# Altium PCB XILINX_LA11.PcbDoc (part 1 of 2)
Units mil, origin at the board's own origin, x right, y up, seen from the top; angles counter-clockwise.
Board outline 4330.71 x 2834.65 mil, 2 copper layers (Top Layer, Bottom Layer); 123 components, 151 nets, 621 pads, 218 vias.
Unrouted connection lines stored in the file: 1.
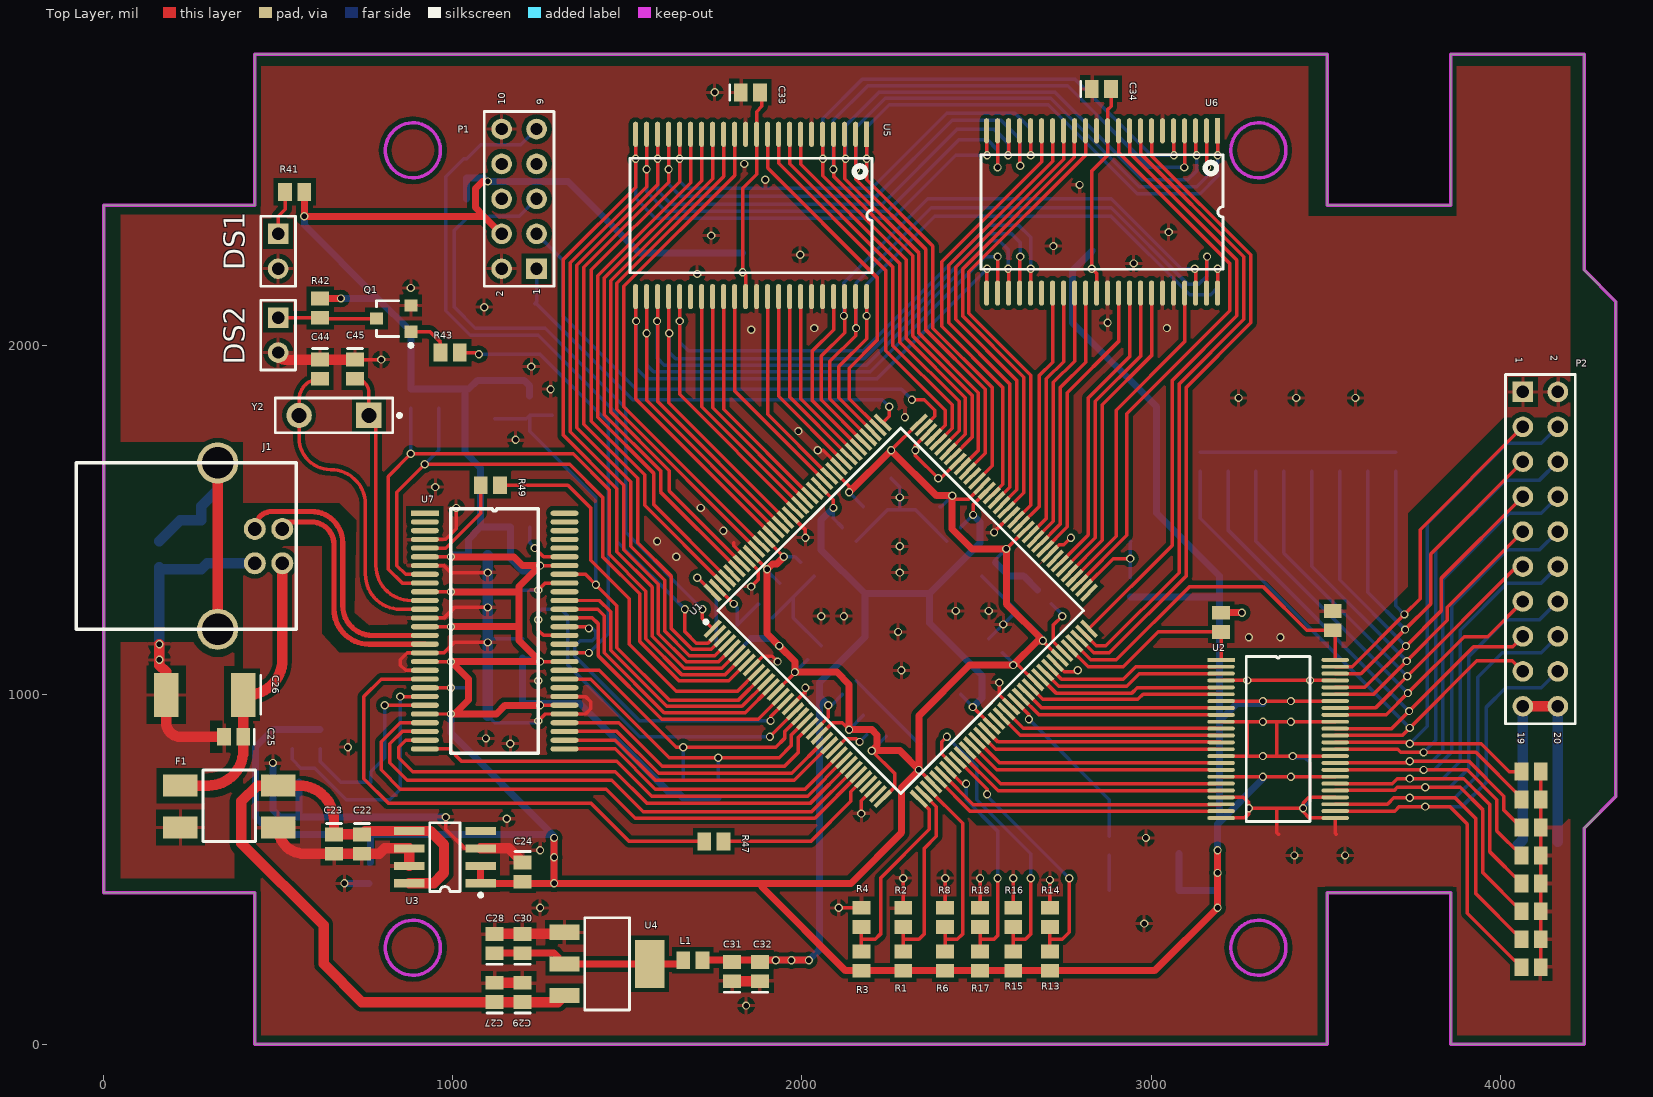
[diagram p0: Top Layer view]
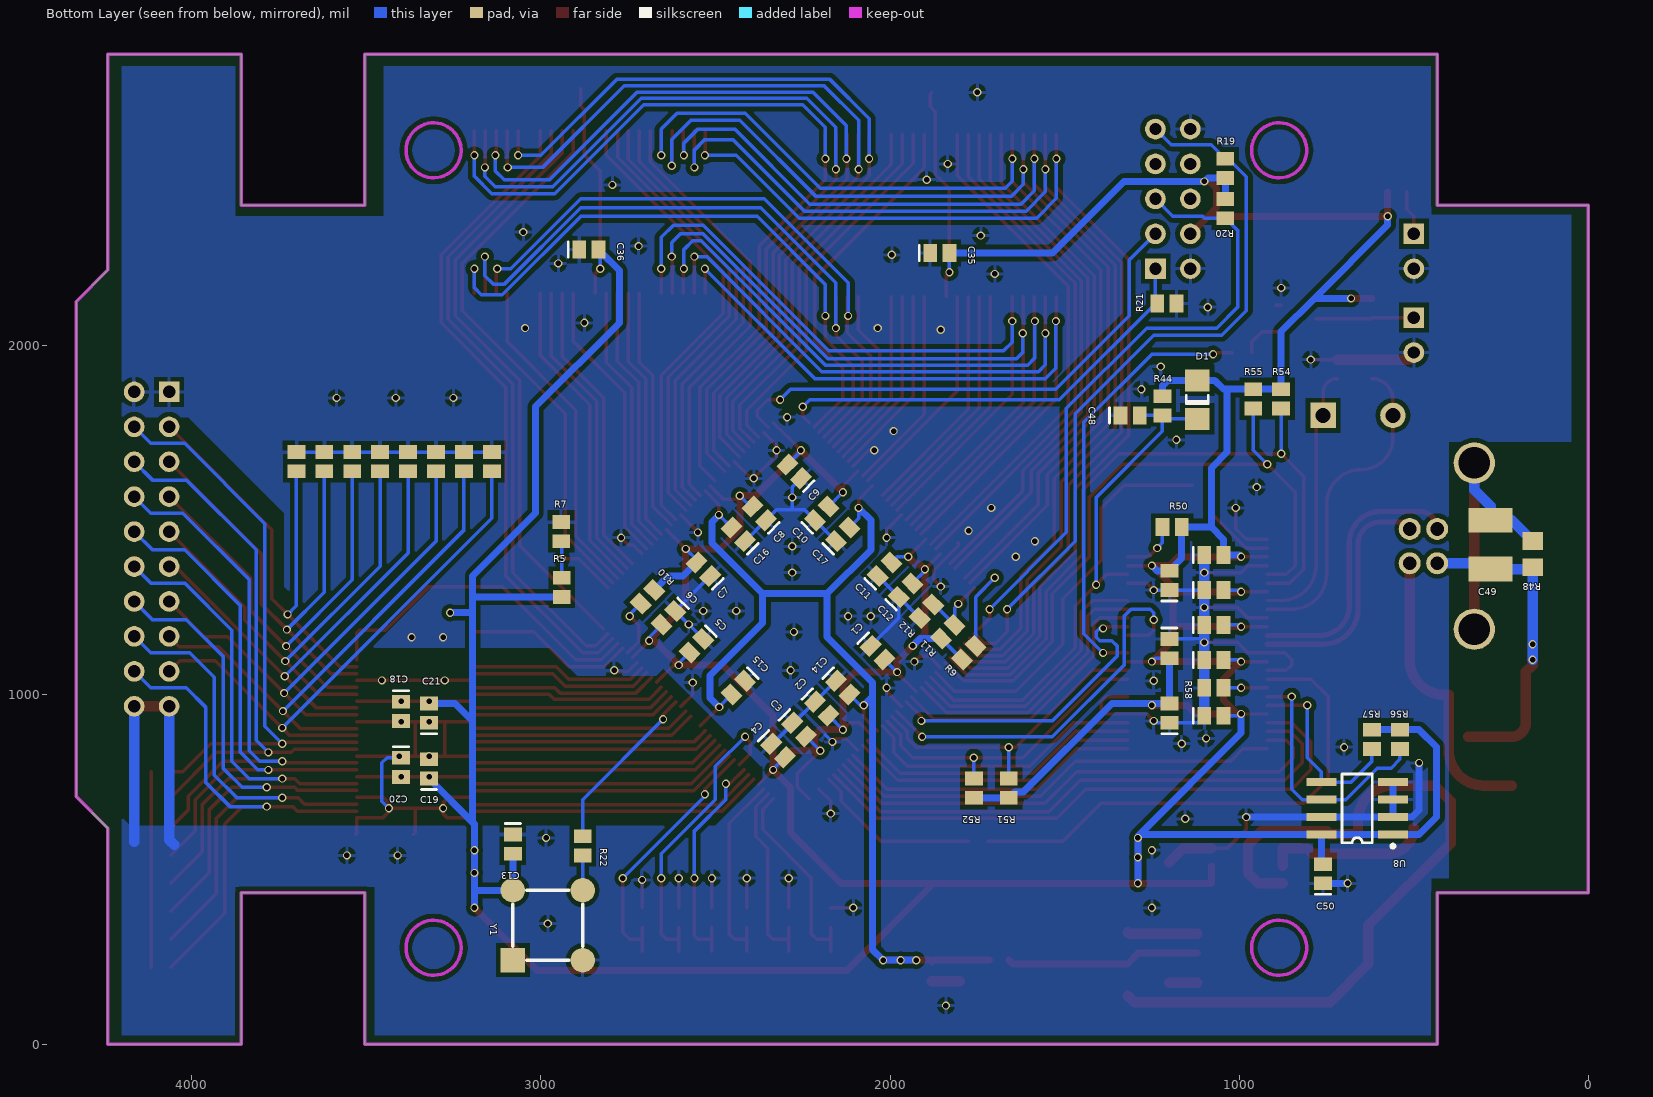
[diagram p1: Bottom Layer view, seen from below]

## Layer stack, top to bottom
Top Layer: signal copper 1.4
Dielectric: dielectric 12.6, FR-4, Dk 4.8
Bottom Layer: signal copper 1.4

## Board outline
0,433.07 0,2401.57 433.07,2401.57 433.07,2834.65 3503.94,2834.65 3503.94,2401.57 3858.27,2401.57 3858.27,2834.65 4240,2834.65 4240,2216.69 4330.71,2125.98 4330.71,708.66 4240,617.95 4240,0 3858.27,0 3858.27,433.07 3503.94,433.07 3503.94,0 433.07,0 433.07,433.07 0,433.07

## Design rules (kind name [scope] priority, off if disabled: settings)
Clearance [All] p1: gap=8
PolygonConnect [All] p1: connectstyle=Relief reliefconductorwidth=10 reliefentries=4 polygonreliefangle="90 Angle"
RoutingVias [All] p1: holewidth=15.75 width=23.62 viastyle="Through Hole" minholewidth=15.75 minwidth=23.62 maxholewidth=15.75 maxwidth=23.62
SilkscreenOverComponentPads [All] p1: minsilkscreentomaskgap=10
SolderMaskExpansion [All] p1: expansion=4
TestPointUsage [All] p1: valid=0 allowmultiple=FALSE
Testpoint [All] p1: side=15 testpointundercomponent=TRUE minsize=40 maxsize=100 preferedsize=60 minholesize=0 maxholesize=40 preferedholesize=32 testpointgrid=1 style=1023 order=0-112345678
Width D- [InNet('D_PLUS')] p1: maxlimit=15 minlimit=15 preferedwidth=15
Width D+ [InNet('D_MINUS')] p2: maxlimit=15 minlimit=15 preferedwidth=15
Width VCC12 [InNet('VCC12')] p3: maxlimit=20 minlimit=10 preferedwidth=20
Width vcc12_ [InNet('NetC28_1')] p4: maxlimit=20 minlimit=20 preferedwidth=20
Width VCC33 [InNet('VCC33')] p5: maxlimit=20 minlimit=10 preferedwidth=20
Width vcc5 [InNet('VCC5')] p6: maxlimit=30 minlimit=30 preferedwidth=30
Width usb_shell [InNet('USBSHEILD')] p7: maxlimit=30 minlimit=30 preferedwidth=30
Width GND [InNet('GND')] p8: maxlimit=30 minlimit=10 preferedwidth=20
Width GND_POWR [InNet('GND_POWER')] p9: maxlimit=30 minlimit=30 preferedwidth=30
Width VBUS [InNet('VBUS')] p10: maxlimit=30 minlimit=30 preferedwidth=30
Width [All] p11: maxlimit=10 minlimit=10 preferedwidth=10
23 further rules are at their usual default settings.

## Classes and differential pairs
component class SRAM25616: C33 C34 C35 C36 U5 U6
component class Power: C22 C23 C24 C25 C26 C27 C28 C29 C30 C31 C32 DS1 F1 L1 R41 U3 U4
component class "Logic in": C18 C19 C20 C21 P2
component class FPGA: C1 C2 C3 C4 C5 C6 C7 C8 C9 C10 C11 C12 C13 C14 C15 C16 C17 P1 R1 R2 R3 R4 R5 R6 R7 R8 R9 R10 R11 R12 R13 R14 R15 R16 R17 R18 R19 R20 R21 R22 U1 Y1

## Components (designator, comment, footprint, x,y, rotation, side; value= is the part's Value field where it differs from the comment)
C1 "" cc0603 2055,1140 r225 bottom
C2 "" cc0603 2215,980 r225 bottom
C3 "" cc0603 2280,920 r225 bottom
C4 "" cc0603 2340,860 r225 bottom
C5 "" cc0603 2535,1160 r315 bottom
C6 "" cc0603 2615,1240 r315 bottom
C7 "" cc0603 2515,1340 r45 bottom
C8 "" cc0603 2355,1500 r45 bottom
C9 "" cc0603 2255,1620 r45 bottom
C10 "" cc0603 2215,1500 r135 bottom
C11 "" cc0603 2035,1340 r135 bottom
C12 "" cc0603 1975,1280 r135 bottom
C13 "" cc0603 3080,600 r270 bottom
C14 "" cc0603 2155,1040 r225 bottom
C15 "" cc0603 2415,1040 r315 bottom
C16 "" cc0603 2415,1440 r45 bottom
C17 "" cc0603 2155,1440 r135 bottom
C18 "" cc0603 3400,980 r270 bottom
C19 "" cc0603 3320,760 r90 bottom
C20 "" cc0603 3400,820 r270 bottom
C21 "" cc0603 3320,920 r90 bottom
C22 "" cc0603 740,600 r270 top
C23 "" cc0603 660,600 r270 top
C24 "" cc0603 1200,520 r270 top
C25 "" cc0603 400,880 r180 top
C26 "" CC6332-2512 300,1000 r0 top
C27 "" cc0603 1120,120 r90 top
C28 "Cap Pol1" cc0603 1120,260 r90 top
C29 "" cc0603 1200,120 r90 top
C30 "" cc0603 1200,260 r90 top
C31 "" cc0603 1800,180 r90 top
C32 "" cc0603 1880,180 r90 top
C33 "" cc0603 1825,2725 r0 top
C34 "" cc0603 2830,2735 r0 top
C35 "" cc0603 1885,2265 r180 bottom
C36 "" cc0603 2890,2275 r180 bottom
C37 "Cap Semi" cc0603 1100,1300 r180 bottom
C38 "Cap Semi" cc0603 1100,1200 r180 bottom
C39 "Cap Semi" cc0603 1100,1100 r180 bottom
C40 "Cap Semi" cc0603 1100,940 r180 bottom
C41 "Cap Semi" cc0603 1200,1300 r90 bottom
C42 "Cap Semi" cc0603 1200,1160 r270 bottom
C43 "Cap Semi" cc0603 1100,1400 r180 bottom
C44 "Cap Semi" cc0603 620,1960 r270 top
C45 "Cap Semi" cc0603 720,1960 r270 top
C47 "Cap Semi" cc0603 1200,920 r90 bottom
C48 "Cap Semi" cc0603 1340,1800 r180 bottom
C49 "Cap" 4.7nF 280,1500 r180 bottom
C50 "Cap Semi" cc0603 760,460 r90 bottom
D1 "IN4148" DIODE 1020,1790 r90 bottom
DS1 "RED" HDR1X2 500,2320 r270 top
DS2 "BLUE" HDR1X2 500,2080 r270 top
F1 "E LIU QUAN" L_eliuquan 300,600 r0 top
J1 "440068-1" USB_interface_type_B 551.26,1560 r180 top locked
L1 "Inductor" CR0603 1660,240 r0 top
P1 "Header 5X2" HDR2X5 1240,2220 r90 top
P2 "Header 10X2H" HDR2X10 4064.25,1867.24 r270 top locked
Q1 "MMBT3904" NPN 880,2140 r180 top
R1 "" CR0603 2290,209.88 r90 top
R2 "" CR0603 2290,389.88 r270 top
R3 "" CR0603 2170,209.88 r90 top
R4 "" CR0603 2170,389.88 r270 top
R5 "" CR0603 2940,1280 r90 bottom
R6 "" CR0603 2410,209.88 r90 top
R7 "" CR0603 2941.52,1440 r90 bottom
R8 "" CR0603 2410,389.88 r270 top
R9 "" CR0603 1755,1140 r315 bottom
R10 "" CR0603 2675,1300 r315 bottom
R11 "" CR0603 1815,1200 r315 bottom
R12 "" CR0603 1915,1220 r135 bottom
R13 "" CR0603 2710,209.88 r90 top
R14 "" CR0603 2710,389.88 r270 top
R15 "" CR0603 2605,209.88 r90 top
R16 "" CR0603 2605,389.88 r270 top
R17 "" CR0603 2510,209.88 r90 top
R18 "" CR0603 2510,389.88 r270 top
R19 "Res1" CR0603 1040,2480 r90 bottom
R20 "Res1" CR0603 1040,2420 r270 bottom
R21 "Res1" CR0603 1180,2120 r0 bottom
R22 "Res1" CR0603 2880,540 r90 bottom
R23 "" CR0603 3700,1640 r90 bottom
R24 "" CR0603 3620,1640 r90 bottom
R25 "" CR0603 3540,1640 r90 bottom
R26 "" CR0603 3200,1180 r90 top
R27 "" CR0603 3460,1640 r90 bottom
R28 "" CR0603 3520,1240 r270 top
R29 "" CR0603 3380,1640 r90 bottom
R30 "" CR0603 3300,1640 r90 bottom
R31 "" CR0603 3220,1640 r90 bottom
R32 "" CR0603 3140,1640 r90 bottom
R33 "" CR0603 4060,780 r0 top
R34 "" CR0603 4060,700 r0 top
R35 "" CR0603 4060,620 r0 top
R36 "" CR0603 4060,540 r0 top
R37 "" CR0603 4060,460 r0 top
R38 "" CR0603 4060,380 r0 top
R39 "" CR0603 4060,300 r0 top
R40 "" CR0603 4060,220 r0 top
R41 "Res2" CR0603 520,2440 r0 top
R42 "" CR0603 620,2080 r90 top
R43 "" CR0603 1020,1980 r180 top
R44 "Res1" CR0603 1220,1800 r90 bottom
R47 "" CR0603 1720,580 r0 top
R48 "Res2" CR0805 160,1440 r270 bottom
R49 "" CR0603 1080,1600 r0 top
R50 "Res1" CR0603 1220,1480 r180 bottom
R51 "" CR0603 1660,760 r270 bottom
R52 "" CR0603 1760,760 r270 bottom
R54 "" CR0603 880,1820 r90 bottom
R55 "" CR0603 960,1820 r90 bottom
R56 "Res1" CR0603 540,900 r270 bottom
R57 "Res1" CR0603 620,900 r270 bottom
R58 "Res2" CR0603 1100,1020 r180 bottom
U1 "XC3S50AN-TQ144" EP2C8T144 1815,1260 r45 top
U2 "SN74LVTH16245" SN74HC16245 3200,1100 r0 top
U3 "LT1129-3.3" sop8 1080,560 r180 top
U4 "Volt Reg" AS1117 1320,320 r270 top
U5 "IS61LV25616" IS61LV25616 2185,2605 r270 top
U6 "IS61LV25616" IS61LV25616 3190,2615 r270 top
U7 "CY7C68013-56" so-56 920,1420 r0 top
U8 "24LC64" sop8 560,700 r0 bottom
Y1 "40M" "jing_zhen(you yuan)" 2980,240 r180 bottom
Y2 "XTAL" "USB_jingzhen 24M" 760,1800 r0 top

## Footprints (in the part's own frame and the unit in brackets; to place one, negate y for a bottom-side part, rotate by r counter-clockwise, add the part's x,y. Pads: shape width x height; smd on the part's side, far side on the other; paste and mask are expansions set on the pad)
4.7nF [mm]
  rect 3.2x1.8 smd: 1(0,0) 2(0,-3.556)
AS1117 [mm]
  rect 1.1x2.15 smd: 1(0,0) 3(4.6,0) 4(2.3,0)
  rect 3.5x2.15 smd: 2(2.3,6.2)
  silkscreen extent -1.05,1.47 5.65,4.73
cc0603 [mm]
  rect 1x1.3 smd: 1(0,0) 2(1.4,0)
  silkscreen extent -0.8,-0.55 -0.8,0.55
CC6332-2512 [mm] "CC6332-2512"
  rect 1.8x3.2 smd: 1(2.54,0) 2(-3.06,0)
  silkscreen extent 3.81,-1.4 3.81,1.4
CR0603 [mm]
  rect 1x1.3 smd: 1(0,0) 2(1.4,0)
CR0805 [mm]
  rect 1.3x1.5 smd: 1(0,0) 2(1.9,0)
DIODE [mm]
  rect 1.6x1.8 smd: 1(0,2.54) 2(2.8,2.54)
  silkscreen extent 1.1,1.74 1.7,3.34
EP2C8T144 [mm]
  rect 1.6x0.3 smd: 1(-2.54,0) 2(-2.54,-0.5) 3(-2.54,-1) 4(-2.54,-1.5) 5(-2.54,-2) 6(-2.54,-2.5) 7(-2.54,-3) 8(-2.54,-3.5) 9(-2.54,-4) 10(-2.54,-4.5) 11(-2.54,-5) 12(-2.54,-5.5) 13(-2.54,-6) 14(-2.54,-6.5) 15(-2.54,-7) 16(-2.54,-7.5) 17(-2.54,-8) 18(-2.54,-8.5) 19(-2.54,-9) 20(-2.54,-9.5) 21(-2.54,-10) 22(-2.54,-10.5) 23(-2.54,-11) 24(-2.54,-11.5) 25(-2.54,-12) 26(-2.54,-12.5) 27(-2.54,-13) 28(-2.54,-13.5) 29(-2.54,-14) 30(-2.54,-14.5) 31(-2.54,-15) 32(-2.54,-15.5) 33(-2.54,-16) 34(-2.54,-16.5) 35(-2.54,-17) 36(-2.54,-17.5) 73(18.66,-17.5) 74(18.66,-17) 75(18.66,-16.5) 76(18.66,-16) 77(18.66,-15.5) 78(18.66,-15) 79(18.66,-14.5) 80(18.66,-14) 81(18.66,-13.5) 82(18.66,-13) 83(18.66,-12.5) 84(18.66,-12) 85(18.66,-11.5) 86(18.66,-11) 87(18.66,-10.5) 88(18.66,-10) 89(18.66,-9.5) 90(18.66,-9) 91(18.66,-8.5) 92(18.66,-8) 93(18.66,-7.5) 94(18.66,-7) 95(18.66,-6.5) 96(18.66,-6) 97(18.66,-5.5) 98(18.66,-5) 99(18.66,-4.5) 100(18.66,-4) 101(18.66,-3.5) 102(18.66,-3) 103(18.66,-2.5) 104(18.66,-2) 105(18.66,-1.5) 106(18.66,-1) 107(18.66,-0.5) 108(18.66,0)
  rect 0.3x1.6 smd: 37(-0.69,-19.35) 38(-0.19,-19.35) 39(0.31,-19.35) 40(0.81,-19.35) 41(1.31,-19.35) 42(1.81,-19.35) 43(2.31,-19.35) 44(2.81,-19.35) 45(3.31,-19.35) 46(3.81,-19.35) 47(4.31,-19.35) 48(4.81,-19.35) 49(5.31,-19.35) 50(5.81,-19.35) 51(6.31,-19.35) 52(6.81,-19.35) 53(7.31,-19.35) 54(7.81,-19.35) 55(8.31,-19.35) 56(8.81,-19.35) 57(9.31,-19.35) 58(9.81,-19.35) 59(10.31,-19.35) 60(10.81,-19.35) 61(11.31,-19.35) 62(11.81,-19.35) 63(12.31,-19.35) 64(12.81,-19.35) 65(13.31,-19.35) 66(13.81,-19.35) 67(14.31,-19.35) 68(14.81,-19.35) 69(15.31,-19.35) 70(15.81,-19.35) 71(16.31,-19.35) 72(16.81,-19.35) 109(16.81,1.85) 110(16.31,1.85) 111(15.81,1.85) 112(15.31,1.85) 113(14.81,1.85) 114(14.31,1.85) 115(13.81,1.85) 116(13.31,1.85) 117(12.81,1.85) 118(12.31,1.85) 119(11.81,1.85) 120(11.31,1.85) 121(10.81,1.85) 122(10.31,1.85) 123(9.81,1.85) 124(9.31,1.85) 125(8.81,1.85) 126(8.31,1.85) 127(7.81,1.85) 128(7.31,1.85) 129(6.81,1.85) 130(6.31,1.85) 131(5.81,1.85) 132(5.31,1.85) 133(4.81,1.85) 134(4.31,1.85) 135(3.81,1.85) 136(3.31,1.85) 137(2.81,1.85) 138(2.31,1.85) 139(1.81,1.85) 140(1.31,1.85) 141(0.81,1.85) 142(0.31,1.85) 143(-0.19,1.85) 144(-0.69,1.85)
  silkscreen extent -2.66,-18.15 17.46,0.82
HDR1X2 [mm] "Connector; Header; 2 Position"
  rect 1.5x1.5 hole 0.9: 1(0,0)
  round 1.5 hole 0.9: 2(2.54,0)
  silkscreen extent -1.27,-1.27 3.81,1.27
HDR2X5 [mm] "Connector; Header; 5x2 Position"
  rect 1.5x1.5 hole 0.9: 1(0,0)
  round 1.5 hole 0.9: 2(0,2.54) 3(2.54,0) 4(2.54,2.54) 5(5.08,0) 6(5.08,2.54) 7(7.62,0) 8(7.62,2.54) 9(10.16,0) 10(10.16,2.54)
  silkscreen extent -1.27,-1.27 11.43,3.81
HDR2X10 [mm] "Connector; Header; 10x2 Position"
  rect 1.5x1.5 hole 0.9: 1(0,0)
  round 1.5 hole 0.9: 2(0,2.54) 3(2.54,0) 4(2.54,2.54) 5(5.08,0) 6(5.08,2.54) 7(7.62,0) 8(7.62,2.54) 9(10.16,0) 10(10.16,2.54) 11(12.7,0) 12(12.7,2.54) 13(15.24,0) 14(15.24,2.54) 15(17.78,0) 16(17.78,2.54) 17(20.32,0) 18(20.32,2.54) 19(22.86,0) 20(22.86,2.54)
  silkscreen extent -1.27,-1.27 24.13,3.81
IS61LV25616 [mil] "IS61LV25616"
  rect 72x15 smd: 1(0,0)
  oval 72x15 smd: 2(0,-31.5) 3(0,-62.99) 4(0,-94.49) 5(0,-125.98) 6(0,-157.48) 7(0,-188.98) 8(0,-220.47) 9(0,-251.97) 10(0,-283.47) 11(0,-314.96) 12(0,-346.46) 13(0,-377.95) 14(0,-409.45) 15(0,-440.95) 16(0,-472.44) 17(0,-503.94) 18(0,-535.43) 19(0,-566.93) 20(0,-598.43) 21(0,-629.92) 22(0,-661.42) 23(464.57,-661.42) 24(464.57,-629.92) 25(464.57,-598.43) 26(464.57,-566.93) 27(464.57,-535.43) 28(464.57,-503.94) 29(464.57,-472.44) 30(464.57,-440.95) 31(464.57,-409.45) 32(464.57,-377.95) 33(464.57,-346.46) 34(464.57,-314.96) 35(464.57,-283.47) 36(464.57,-251.97) 37(464.57,-220.47) 38(464.57,-188.98) 39(464.57,-157.48) 40(464.57,-125.98) 41(464.57,-94.49) 42(464.57,-62.99) 43(464.57,-31.5) 44(464.57,0)
  silkscreen extent 68,-677 396,16
"jing_zhen(you yuan)" [mil]
  rect 70x70 smd: 1(-100,0)
  round 70 smd: 2(100,0) 3(100,200) 4(-100,200)
  silkscreen extent -100,0 100,200
L_eliuquan [mm]
  rect 2.5x1.6 smd: 1(-2.032,3.556) 2(-2.032,0.508) 3(5.08,0.508) 4(5.08,3.556)
  silkscreen extent -0.38,-0.51 3.43,4.7
NPN [mm] "NPN"
  rect 0.95x0.9 smd: 1(0,2.54) 2(0,0.64) 3(2.5,1.59)
  silkscreen extent -0.13,0.29 2.5,3.66
SN74HC16245 [mm]
  rect 2x0.28 smd: 1(0,0)
  oval 2x0.28 smd: 2(0,-0.5) 3(0,-1) 4(0,-1.5) 5(0,-2) 6(0,-2.5) 7(0,-3) 8(0,-3.5) 9(0,-4) 10(0,-4.5) 11(0,-5) 12(0,-5.5) 13(0,-6) 14(0,-6.5) 15(0,-7) 16(0,-7.5) 17(0,-8) 18(0,-8.5) 19(0,-9) 20(0,-9.5) 21(0,-10) 22(0,-10.5) 23(0,-11) 24(0,-11.5) 25(8.3,-11.5) 26(8.3,-11) 27(8.3,-10.5) 28(8.3,-10) 29(8.3,-9.5) 30(8.3,-9) 31(8.3,-8.5) 32(8.3,-8) 33(8.3,-7.5) 34(8.3,-7) 35(8.3,-6.5) 36(8.3,-6) 37(8.3,-5.5) 38(8.3,-5) 39(8.3,-4.5) 40(8.3,-4) 41(8.3,-3.5) 42(8.3,-3) 43(8.3,-2.5) 44(8.3,-2) 45(8.3,-1.5) 46(8.3,-1) 47(8.3,-0.5) 48(8.3,0)
  silkscreen extent 1.84,-11.75 6.47,0.25
so-56 [mil]
  rect 80x15 smd: 1(0,100)
  oval 80x15 smd: 2(0,75) 3(0,50) 4(0,25) 5(0,0) 6(0,-25) 7(0,-50) 8(0,-75) 9(0,-100) 10(0,-125) 11(0,-150) 12(0,-175) 13(0,-200) 14(0,-225) 15(0,-250) 16(0,-275) 17(0,-300) 18(0,-325) 19(0,-350) 20(0,-375) 21(0,-400) 22(0,-425) 23(0,-450) 24(0,-475) 25(0,-500) 26(0,-525) 27(0,-550) 28(0,-575) 29(400,-575) 30(400,-550) 31(400,-525) 32(400,-500) 33(400,-475) 34(400,-450) 35(400,-425) 36(400,-400) 37(400,-375) 38(400,-350) 39(400,-325) 40(400,-300) 41(400,-275) 42(400,-250) 43(400,-225) 44(400,-200) 45(400,-175) 46(400,-150) 47(400,-125) 48(400,-100) 49(400,-75) 50(400,-50) 51(400,-25) 52(400,0) 53(400,25) 54(400,50) 55(400,75) 56(400,100)
  silkscreen extent 75,-588 325,113
sop8 [mm]
  rect 2.2x0.6 smd: 1(0,2.54) 2(0,1.27) 3(0,0) 4(0,-1.27) 5(5.2,-1.27) 6(5.2,0) 7(5.2,1.27) 8(5.2,2.54)
  silkscreen extent -0.12,-1.86 3.7,3.51
USB_interface_type_B [mm]
  round 1.6 hole 1: 1(0.997,4.661) 2(0.997,2.161) 3(2.997,2.161) 4(2.997,4.661)
  round 3 hole 2.3: 5(5.697,9.461) 5(5.697,-2.639)
  silkscreen extent 0,-2.64 16,9.46
"USB_jingzhen 24M" [mm]
  rect 1.85x1.85 hole 1.1: 1(0,0)
  round 1.85 hole 1.1: 2(-5.08,0)
  silkscreen extent -6.82,-1.27 2.35,1.27

## Part data
C1 C2 C3 C4 C5 C6 C7 C8 C9 C10 C11 C12 C13 C14 C15 C16 C17 C18 C19 C20 C21 C23 C24 C25 C29 C30 C31 C32 C33 C34 C35 C36: library part Cap, "Capacitor"
C22 C26 C27: library part "Cap Pol1", "Polarized Capacitor (Radial)"
C28: "Polarized Capacitor (Radial)"
C37 C38 C39 C40 C41 C42 C43 C44 C45 C47 C48 C50: "Capacitor (Semiconductor SIM Model)"
C49: "Capacitor"
D1: library part "Diode 1N4001", "1 Amp General Purpose Rectifier"
DS1 DS2: library part LED0, "Typical INFRARED GaAs LED"
P1: "Header, 5-Pin, Dual row"
Q1: library part 2N3904, "NPN General Purpose Amplifier"
R1 R2 R3 R4 R5 R6 R7 R8 R9 R10 R11 R12 R13 R14 R15 R16 R17 R18 R23 R24 R25 R26 R27 R28 R29 R30 R31 R32 R33 R34 R35 R36 R37 R38 R39 R40 R42: library part Res3, "Resistor"
R19 R20 R21 R22 R41 R44 R48 R50 R56 R57 R58: "Resistor"
R43 R47 R49 R51 R52 R54 R55: library part Res1, "Resistor"
U1: library part XC3S50AN-5TQ144
U4: "Voltage Regulator"
U8: library part EPCS1SI8, "EPCS1 Series, In-system programmable 3.3V configuration device, 8-Pin SOIC, 1-Megabit, Industrial Grade"
Y1: library part Component_1
Y2: "Crystal Oscillator"

## Via types
v1: diameter 23.62, hole 15.75, Top Layer to Bottom Layer, 218 vias

## Nets (pads, with @x,y where several pads share a name; then routed paths per layer and width w, separated by ;. In a path a pad name is that pad's centre, name@x,y a point inside that pad or via, vN(x,y) a via of type N, cw(c..) or ccw(c..) an arc to the next point about the centre after c; other vN are vias at no path point)
A0: U1.96 U5.1 U6.1 | length 2538
  Top Layer w10: U5.1@2185,2605 v1(2185,2535) 2185,2475 2375,2285 2375,2050 2545,1880 2545,1655.93 U1.96@2501.51,1612.44 ; v1(3190,2545) U6.1@3190,2615
  Bottom Layer w10: v1(2185,2535) 2185,2625 2250,2690 2705,2690 2960,2435 3140,2435 3190,2485 v1(3190,2545)
A1: U1.98 U5.2 U6.2 | length 2545
  Top Layer w10: U5.2@2153.5,2605 2153.5,2476.5 2355,2275 2355,2044.54 2525,1874.54 2525,1691.61 U1.98@2473.67,1640.28 ; v1@3158.5,2511.5 U6.2@3158.5,2615
  Bottom Layer w10: v1(2155,2505) 2155,2625 2238,2708 2712.46,2708 2965.46,2455 3130,2455 3160,2485 v1(3160,2510)
A2: U1.99 U5.3 U6.3 | length 2494.3
  Top Layer w10: U5.3@2122.01,2605 2122.01,2477.99 2335,2265 2335,2035 2505,1865 2505,1699.45 U1.99@2459.75,1654.2 ; v1@3127.01,2547.99 U6.3@3127.01,2615
  Bottom Layer w10: v1(2125,2535) 2125,2630 2221,2726 2724,2726 2975,2475 3105,2475 3130,2500 v1(3130,2545)
A3: U1.101 U5.4 U6.4 | length 2497.4
  Top Layer w10: U5.4@2090.51,2605 2090.51,2484.03 2317,2257.54 2317,2027.54 2487,1857.54 2487,1737.13 U1.101@2431.91,1682.04 ; v1@3095.51,2510.51 U6.4@3095.51,2615
  Bottom Layer w10: v1(2090,2505) 2090,2645 2189,2744 2761,2744 2995,2510 v1(3095,2510)
A4: U1.102 U5.5 U6.5 | length 2424.5
  Top Layer w10: U5.5@2059.02,2605 2059.02,2485.98 2299,2246 2299,2020.09 2468,1851.09 2468,1745.97 U1.102@2417.99,1695.96 ; v1@3064.02,2545.98 U6.5@3064.02,2615
  Bottom Layer w10: v1(2060,2535) 2060,2650 2172,2762 2783,2762 3000,2545 v1(3065,2545)
A5: U1.142 U5.18 U6.18 | length 2875.6
  Top Layer w10: U5.18@1649.57,2605 v1(1649.57,2535) 1649.57,2469.57 1397,2217 1397,1783 1550,1630 1550,1542.26 U1.142@1772.13,1320.13 ; v1@2654.57,2545.43 U6.18@2654.57,2615
  Bottom Layer w10: v1(1649.57,2535) 1649.57,2470.43 1670,2450 2200,2450 2415,2665 2610,2665 2655,2620 v1(2655,2545)
A6: U1.3 U5.19 U6.19 | length 3154.9
  Top Layer w10: U5.19@1618.07,2605 v1(1618.07,2505) 1618.07,2467.16 1375,2224.09 1375,1775 1530,1620 1530,1435 1625,1340 1625,1190 1685,1130 1740.68,1130 U1.3@1772.13,1161.45 ; v1@2623.07,2516.93 U6.19@2623.07,2615
  Bottom Layer w10: v1(1618.07,2505) 1618.07,2461.93 1653,2427 2212,2427 2430,2645 2570,2645 2625,2590 v1(2625,2515)
A7: U1.4 U5.20 U6.20 | length 3165.7
  Top Layer w10: U5.20@1586.57,2605 v1(1586.57,2535) 1586.57,2461.12 1355,2229.54 1355,1765 1510,1610 1510,1425 1607,1328 1607,1182.54 1677.54,1112 1750.52,1112 U1.4@1786.05,1147.53 ; v1@2591.57,2546.57 U6.20@2591.57,2615
  Bottom Layer w10: v1(1586.57,2535) 1586.57,2443.43 1625,2405 2230,2405 2445,2620 2550,2620 2590,2580 v1(2590,2545)
A8: U1.5 U5.21 U6.21 | length 3230.6
  Top Layer w10: U5.21@1555.08,2605 v1(1555.08,2505) 1555.08,2455.08 1337,2237 1337,1753 1490,1600 1490,1415 1589,1316 1589,1175.09 1670.09,1094 1760.36,1094 U1.5@1799.97,1133.61 ; v1@2560.08,2510.08 U6.21@2560.08,2615
  Bottom Layer w10: v1(1555.08,2505) 1555.08,2439.92 1610,2385 2245,2385 2450,2590 2530,2590 2560,2560 v1(2560,2510)
A9: U1.6 U5.22 U6.22 | length 3213.6
  Top Layer w10: U5.22@1523.58,2605 v1(1523.58,2535) 1523.58,2453.58 1317,2247 1317,1743 1470,1590 1470,1409.54 1571,1308.54 1571,1167.63 1662.63,1076 1770.19,1076 U1.6@1813.89,1119.69 ; v1@2528.58,2546.42 U6.22@2528.58,2615
  Bottom Layer w10: v1(1523.58,2535) 1523.58,2421.42 1580,2365 2260,2365 2440,2545 v1(2530,2545)
A10: U1.132 U5.23 U6.23 | length 2192.8
  Top Layer w10: U5.23@1523.58,2140.43 1523.58,1847.07 U1.132@1911.32,1459.33 ; U6.23@2528.58,2150.43 v1@2528.58,2218.58
  Bottom Layer w10: v1(1525,2070) 1525,1935 1555,1905 2215,1905 v1(2530,2220)
A11: U1.131 U5.24 U6.24 | length 2165
  Top Layer w10: U5.24@1555.08,2140.43 1555.08,1843.41 U1.131@1925.24,1473.25 ; U6.24@2560.08,2150.43 v1@2560.08,2254.92
  Bottom Layer w10: v1(1555,2035) 1555,1945 1575,1925 2195,1925 2525,2255 v1(2560,2255)
A12: U1.130 U5.25 U6.25 | length 2198.8
  Top Layer w10: U5.25@1586.57,2140.43 1586.57,1839.75 U1.130@1939.16,1487.17 ; U6.25@2591.57,2150.43 v1@2591.57,2218.43
  Bottom Layer w10: v1(1585,2070) 1585,1965 1606,1944 2184.91,1944 2540.91,2300 2565,2300 2590,2275 v1(2590,2220)
A13: U1.129 U5.26 U6.26 | length 2146.9
  Top Layer w10: U5.26@1618.07,2140.43 1618.07,1836.1 U1.129@1953.08,1501.08 ; U6.26@2623.07,2150.43 v1@2623.07,2253.07
  Bottom Layer w10: v1(1620,2035) 1620,1980 1638,1962 2177.46,1962 2535.46,2320 2600,2320 2625,2295 v1(2625,2255)
A14: U1.127 U5.27 U6.27 | length 2146.9
  Top Layer w10: U5.27@1649.57,2140.43 1649.57,1860.28 U1.127@1980.92,1528.92 ; U6.27@2654.57,2150.43 v1@2654.57,2219.57
  Bottom Layer w10: v1(1650,2070) 1650,2010 1675,1985 2175,1985 2535,2345 2620,2345 2655,2310 v1(2655,2220)
A15: U1.113 U5.42 U6.42 | length 1844.2
  Top Layer w10: U5.42@2122.01,2140.43 2122.01,2037.01 2055,1970 2055,1844.59 U1.113@2175.79,1723.8 ; U6.42@3127.01,2150.43 v1@3127.01,2217.99
  Bottom Layer w10: v1(2120,2085) 2120,2180 2360,2420 2885.91,2420 3085.91,2220 v1(3125,2220)
A16: U1.112 U5.43 U6.43 | length 1962.2
  Top Layer w10: U5.43@2153.5,2140.43 2153.5,2028.5 2080,1955 2080,1847.43 U1.112@2189.71,1737.71 ; U6.43@3158.5,2150.43 v1@3158.5,2253.5
  Bottom Layer w10: v1(2155,2050) 2155,2180 2370,2395 2885.46,2395 3105.46,2175 3135,2175 3160,2200 v1(3160,2255)
A17: U1.111 U5.44 U6.44 | length 1864.6
  Top Layer w10: U5.44@2185,2140.43 v1(2185,2085) 2185,2020 2105,1940 2105,1850.26 U1.111@2203.63,1751.63 ; U6.44@3190,2150.43 v1(3190,2220)
  Bottom Layer w10: v1(2185,2085) 2185,2175 2380,2370 2885,2370 3110,2145 3170,2145 3190,2165 v1(3190,2220)
CH1: P2.3 R23.1 U2.47 | length 1358.4
  Top Layer w10: U2.47@3526.77,1080.32 3575.31,1080.32 v1(3725,1230) 3770,1275 3770,1472.99 P2.3@4064.25,1767.24
  Bottom Layer w10: R23.1@3700,1640 3700,1255 v1(3725,1230)
CH2: P2.5 R24.1 U2.46 | length 1369.9
  Top Layer w10: U2.46@3526.77,1060.63 3600.63,1060.63 v1(3726.91,1186.91) 3800,1260 3800,1402.99 P2.5@4064.25,1667.24
  Bottom Layer w10: R24.1@3620,1640 3620,1293.83 v1(3726.91,1186.91)
CH3: P2.7 R25.1 U2.44 | length 1397.1
  Top Layer w10: U2.44@3526.77,1021.26 3611.26,1021.26 v1(3729.5,1139.5) 3830,1240 3830,1332.99 P2.7@4064.25,1567.24
  Bottom Layer w10: R25.1@3540,1640 3540,1328.99 v1(3729.5,1139.5)
CH4: P2.9 R27.1 U2.43 | length 1408.5
  Top Layer w10: U2.43@3526.77,1001.57 3636.57,1001.57 v1(3731.6,1096.6) 3848,1213 3848,1250.99 P2.9@4064.25,1467.24
  Bottom Layer w10: R27.1@3460,1640 3460,1368.21 v1(3731.6,1096.6)
CH5: P2.11 R29.1 U2.41 | length 1438.4
  Top Layer w10: U2.41@3526.77,962.2 3642.2,962.2 v1(3733.08,1053.08) 4047.24,1367.24 P2.11@4064.25,1367.24
  Bottom Layer w10: R29.1@3380,1640 3380,1406.16 v1(3733.08,1053.08)
CH6: P2.13 R30.1 U2.40 | length 1487.2
  Top Layer w10: U2.40@3526.77,942.52 3672.52,942.52 v1(3735,1005) 3896.27,1166.27 3963.28,1166.27 P2.13@4064.25,1267.24
  Bottom Layer w10: R30.1@3300,1640 3300,1440 v1(3735,1005)
CH7: P2.15 R31.1 U2.38 | length 1551.4
  Top Layer w10: U2.38@3526.77,903.15 3688.15,903.15 v1(3738.36,953.36) 3922.96,1137.96 4034.96,1137.96 P2.15@4064.25,1167.24 P2.15@4062.01,1165
  Bottom Layer w10: R31.1@3220,1640 3220,1471.72 v1(3738.36,953.36)
CH8: P2.17 R32.1 U2.37 | length 1622.2
  Top Layer w10: U2.37@3526.77,883.47 3718.47,883.47 v1(3740,905) 3932.5,1097.5 4034,1097.5 P2.17@4064.25,1067.24
  Bottom Layer w10: R32.1@3140,1640 3140,1505 v1(3740,905)
CH9: P2.4 R33.1 U2.36 | length 1707.7
  Top Layer w10: U2.36@3526.77,863.78 3736.22,863.78 v1(3740,860) 3945,860 4025,780 R33.1@4060,780
  Bottom Layer w10: v1(3740,860) 3790,910 3790,1490 4020,1720 4117.01,1720 P2.4@4164.25,1767.24
CH10: P2.6 R34.1 U2.35 | length 1644.1
  Top Layer w10: U2.35@3526.77,844.09 3705.9,844.09 3715,835 v1(3780,835) 3930,835 4060,705 R34.1@4060,700
  Bottom Layer w10: v1(3780,835) 3815,870 3815,1415 4015,1615 4112.01,1615 P2.6@4164.25,1667.24
CH11: P2.8 R35.1 U2.33 | length 1662.5
  Top Layer w10: U2.33@3526.77,804.72 3734.73,804.72 v1(3740,810) 3910,810 4010,710 4010,670 R35.1@4060,620
  Bottom Layer w10: v1(3740,810) 3805,810 3835,840 3835,1330 4025,1520 4117.01,1520 P2.8@4164.25,1567.24
CH12: P2.10 R36.1 U2.32 | length 1600.3
  Top Layer w10: U2.32@3526.77,785.04 U2.32@3526.77,785.04 v1(3780,785) 3905,785 3990,700 3990,610 R36.1@4060,540
  Bottom Layer w10: v1(3780,785) 3810,785 3860,835 3860,1255 4020,1415 4112.01,1415 P2.10@4164.25,1467.24
CH13: P2.12 R37.1 U2.30 | length 1638
  Top Layer w10: U2.30@3526.77,745.67 3690.21,745.67 3704.54,760 v1(3740,760) 3895,760 3970,685 3970,550 R37.1@4060,460
  Bottom Layer w10: v1(3740,760) 3835,760 3885,810 3885,1185 4020,1320 4117.01,1320 P2.12@4164.25,1367.24
CH14: P2.14 R38.1 U2.29 | length 1576.6
  Top Layer w10: U2.29@3526.77,725.99 3695.98,725.99 3705,735 v1(3785,735) 3885,735 3950,670 3950,490 R38.1@4060,380
  Bottom Layer w10: v1(3785,735) 3855,735 3910,790 3910,1110 4015,1215 4112.01,1215 P2.14@4164.25,1267.24
CH15: P2.16 R39.1 U2.27 | length 1614.3
  Top Layer w10: U2.27@3526.77,686.61 3676.61,686.61 3695,705 v1(3740,705) 3870,705 3930,645 3930,430 R39.1@4060,300
  Bottom Layer w10: v1(3740,705) 3870,705 3935,770 3935,1050 4005,1120 4117.01,1120 P2.16@4164.25,1167.24
CH16: P2.18 R40.1 U2.26 | length 1544.2
  Top Layer w10: U2.26@3526.77,666.93 3696.93,666.93 3710,680 v1(3785,680) 3855,680 3905,630 3905,375 R40.1@4060,220
  Bottom Layer w10: v1(3785,680) 3890,680 3960,750 3960,965 4015,1020 4117.01,1020 P2.18@4164.25,1067.24
CLKOUT: R49.2 U1.10 | length 1165.2
  Top Layer w10: R49.2@1135.12,1600 1330,1600 1395,1535 1395,1385 1505,1275 1505,1145 1640,1010 1815.55,1010 U1.10@1869.56,1064.01
CTL0/FLAGA#: U7.36
CTL1/FLAGB#: R52.1 U1.20 U7.37 | length 903.6
  Top Layer w10: U7.37@1320,1045 1395,1045 1620,820 v1(1760,820) 1935,820 1970,855 1970,886.06 U1.20@2008.76,924.82
  Bottom Layer w10: R52.1@1760,760 v1(1760,820)
CTL2/FLAGC#: R51.1 U1.19 U7.38 | length 903.8
  Top Layer w10: U7.38@1320,1070 1420,1070 1640,850 v1(1660,850) 1925,850 1950,875 1950,893.9 U1.19@1994.84,938.74
  Bottom Layer w10: R51.1@1660,760 v1(1660,850)
D_MINUS: J1.2 U7.16 | length 698.6
  Top Layer w15: J1.2@512,1474.93 cw(c532.07,1474.93) 532.07,1495 595,1495 cw(c595,1430) 660,1430 660,1245 ccw(c760,1245) 760,1145 U7.16@920,1145
D_PLUS: J1.3 U7.15 | length 795.2
  Top Layer w15: J1.3@433.26,1474.93 cw(c483.33,1474.93) 483.33,1525 595,1525 cw(c595,1435) 685,1435 685,1290 685,1255 ccw(c770,1255) 770,1170 U7.15@920,1170
DQ0: U1.103 U5.7 | length 1102.2
  Top Layer w10: U5.7@1996.02,2605 1996.02,2518.98 2280,2235 2280,2010 2450,1840 2450,1755.81 U1.103@2404.07,1709.88
DQ1: U1.104 U5.8 | length 1090.5
  Top Layer w10: U5.8@1964.53,2605 1964.53,2520.47 2260,2225 2260,2000 2430,1830 2430,1763.64 U1.104@2390.15,1723.8
DQ2: U1.105 U5.9 | length 1078.8
  Top Layer w10: U5.9@1933.03,2605 1933.03,2521.97 2240,2215 2240,1985 2410,1815 2410,1771.48 U1.105@2376.23,1737.71
DQ3: U1.110 U5.10 | length 1036.6
  Top Layer w10: U5.10@1901.53,2605 1901.53,2508.47 2215,2195 2215,2015 2135,1935 2135,1848.1 U1.110@2217.55,1765.55
DQ4: U1.134 U5.13 | length 1467.8
  Top Layer w10: U5.13@1807.05,2605 1807.05,2487.05 1490,2170 1490,1824.97 U1.134@1883.48,1431.49
DQ5: U1.135 U5.14 | length 1479.5
  Top Layer w10: U5.14@1775.55,2605 1775.55,2484.18 1470,2178.63 1470,1817.13 U1.135@1869.56,1417.57
DQ6: U1.138 U5.15 | length 1505.8
  Top Layer w10: U5.15@1744.05,2605 1744.05,2478.14 1452,2186.09 1452,1809.68 1620,1641.68 1620,1583.62 U1.138@1827.81,1375.81
DQ7: U1.139 U5.16 | length 1515.8
  Top Layer w10: U5.16@1712.56,2605 1712.56,2472.1 1434,2193.54 1434,1802.22 1595,1641.22 1595,1580.78 U1.139@1813.89,1361.89
DQ8: U1.126 U5.29 | length 714.5
  Top Layer w10: U5.29@1712.56,2140.43 1712.56,1825.12 U1.126@1994.84,1542.84
DQ9: U1.125 U5.30 | length 693.3
  Top Layer w10: U5.30@1744.05,2140.43 1744.05,1821.47 U1.125@2008.76,1556.76
DQ10: U1.124 U5.31 | length 672.1
  Top Layer w10: U5.31@1775.55,2140.43 1775.55,1817.81 U1.124@2022.68,1570.68
DQ11: U1.121 U5.32 | length 634.6
  Top Layer w10: U5.32@1807.05,2140.43 1807.05,1869.83 U1.121@2064.44,1612.44
DQ12: U1.120 U5.35 | length 587.3
  Top Layer w10: U5.35@1901.53,2140.43 1901.53,1803.18 U1.120@2078.36,1626.36
DQ13: U1.117 U5.36 | length 549.8
  Top Layer w10: U5.36@1933.03,2140.43 1933.03,1855.2 U1.117@2120.11,1668.12
DQ14: U1.116 U5.37 | length 528.6
  Top Layer w10: U5.37@1964.53,2140.43 1964.53,1852.65 2134.03,1683.14 U1.116@2134.03,1682.04
DQ15: U1.115 U5.38 | length 507.4
  Top Layer w10: U5.38@1996.02,2140.43 1996.02,1847.89 U1.115@2147.95,1695.96
DQ16: U1.70 U6.7 | length 1883.7
  Top Layer w10: U1.70@2793.81,1161.45 2835.26,1120 2880,1120 3100,1340 3100,1880 3285,2065 3285,2260 3001.02,2543.98 U6.7@3001.02,2615
DQ17: U1.71 U6.8 | length 1837.9
  Top Layer w10: U1.71@2807.73,1175.37 2843.1,1140 2870,1140 3080,1350 3080,1890 3265,2075 3265,2254.54 2969.53,2550.02 U6.8@2969.53,2615
DQ18: U1.72 U6.9 | length 1728.2
  Top Layer w10: U1.72@2821.65,1189.29 3060,1427.64 3060,1900 3245,2085 3245,2245 2938.03,2551.97 U6.9@2938.03,2615
DQ19: U1.75 U6.10 | length 1605.4
  Top Layer w10: U1.75@2793.81,1320.13 2930,1456.32 2930,1805 3225,2100 3225,2235 2906.53,2553.47 U6.10@2906.53,2615
DQ20: U1.88 U6.13 | length 1343.1
  Top Layer w10: U1.88@2612.86,1501.08 2655,1543.22 2655,1915 2478,2092 2478,2211.63 2812.05,2545.68 U6.13@2812.05,2615
DQ21: U1.90 U6.14 | length 1312
  Top Layer w10: U1.90@2585.02,1528.92 2635,1578.9 2635,1909.54 2460,2084.54 2460,2219.09 2780,2539.09 2780,2614.45 U6.14@2780.55,2615
DQ22: U1.91 U6.15 | length 1290.8
  Top Layer w10: U1.91@2571.1,1542.84 2615,1586.74 2615,1900 2440,2075 2440,2224.54 2749.05,2533.6 U6.15@2749.05,2615
DQ23: U1.92 U6.16 | length 1269.6
  Top Layer w10: U1.92@2557.18,1556.76 2595,1594.58 2595,1890 2420,2065 2420,2230 2717.56,2527.56 U6.16@2717.56,2615
DQ24: U1.87 U6.29 | length 700.9
  Top Layer w10: U1.87@2626.78,1487.17 2680,1540.38 2680,1915 2717.56,1952.56 U6.29@2717.56,2150.43
DQ25: U1.85 U6.30 | length 730.2
  Top Layer w10: U1.85@2654.62,1459.33 2700,1504.71 2700,1905 2749.05,1954.05 U6.30@2749.05,2150.43
DQ26: U1.84 U6.31 | length 751.4
  Top Layer w10: U1.84@2668.54,1445.41 2720,1496.87 2720,1895 2780.55,1955.55 U6.31@2780.55,2150.43
DQ27: U1.83 U6.32 | length 772.6
  Top Layer w10: U1.83@2682.46,1431.49 2740,1489.03 2740,1880 2812.05,1952.05 U6.32@2812.05,2150.43
DQ28: U1.82 U6.35 | length 819.9
  Top Layer w10: U1.82@2696.38,1417.57 2760,1481.19 2760,1865 2906.53,2011.53 U6.35@2906.53,2150.43